# EAGLE board 4.2in display-Panel (EAGLE 9.0.1)
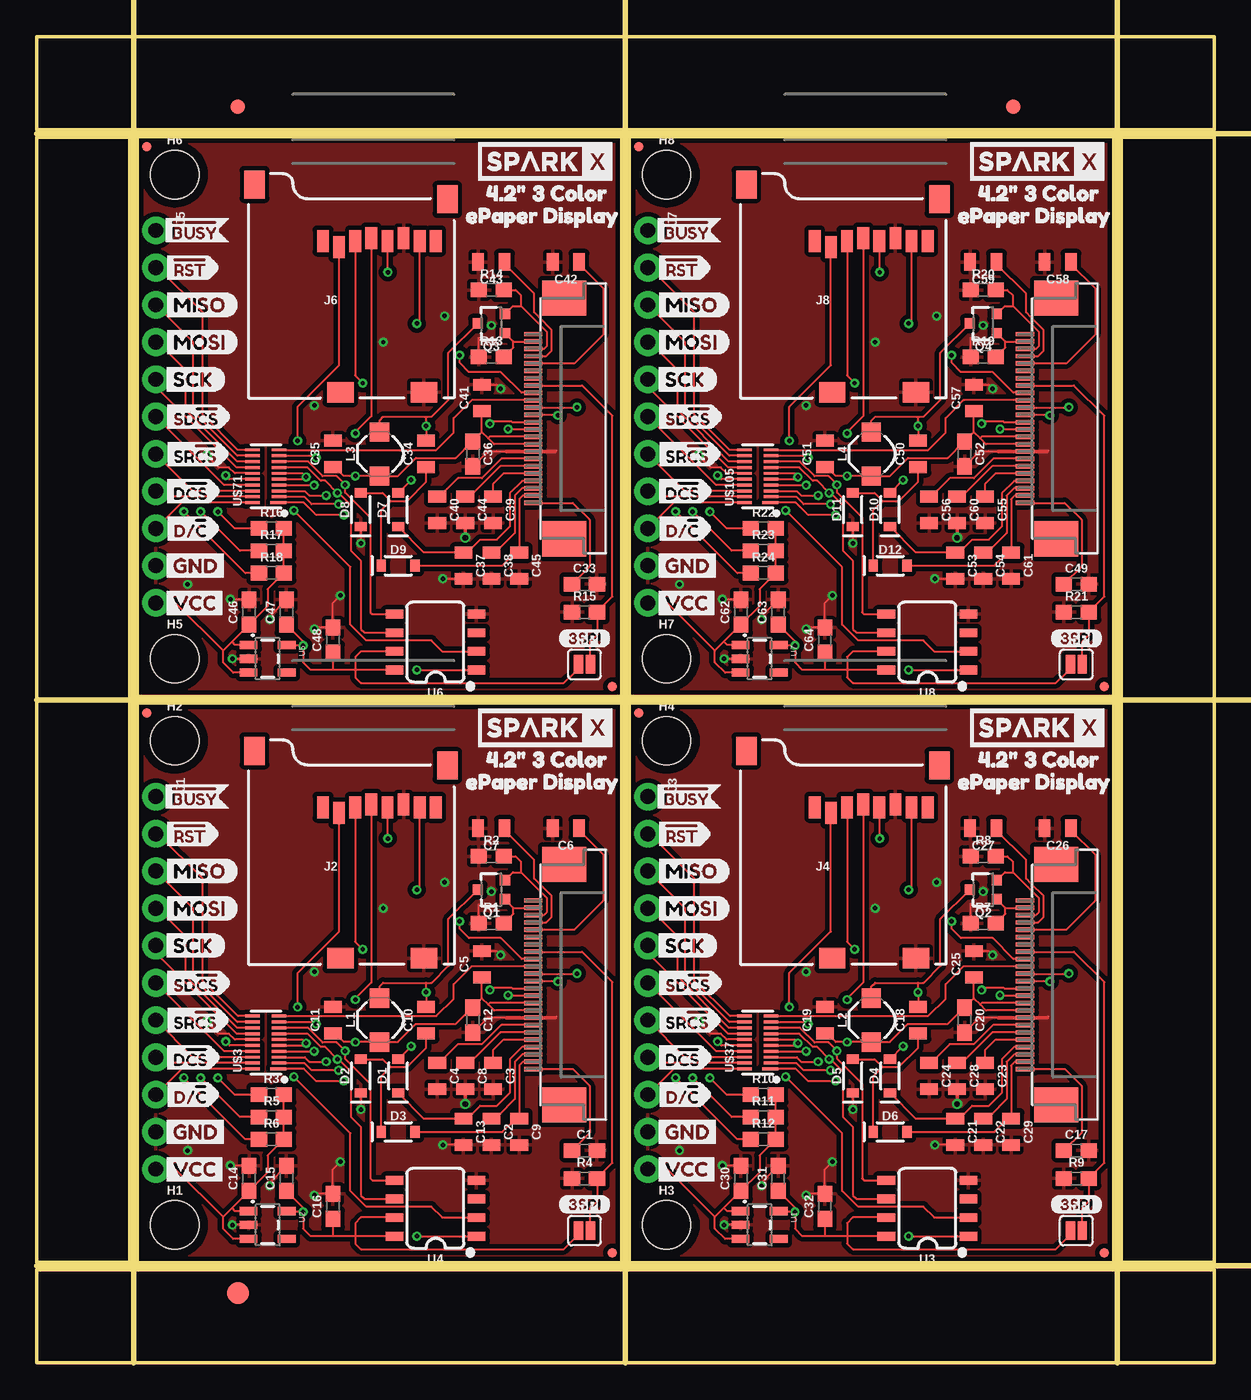
[diagram p0: board, top side]
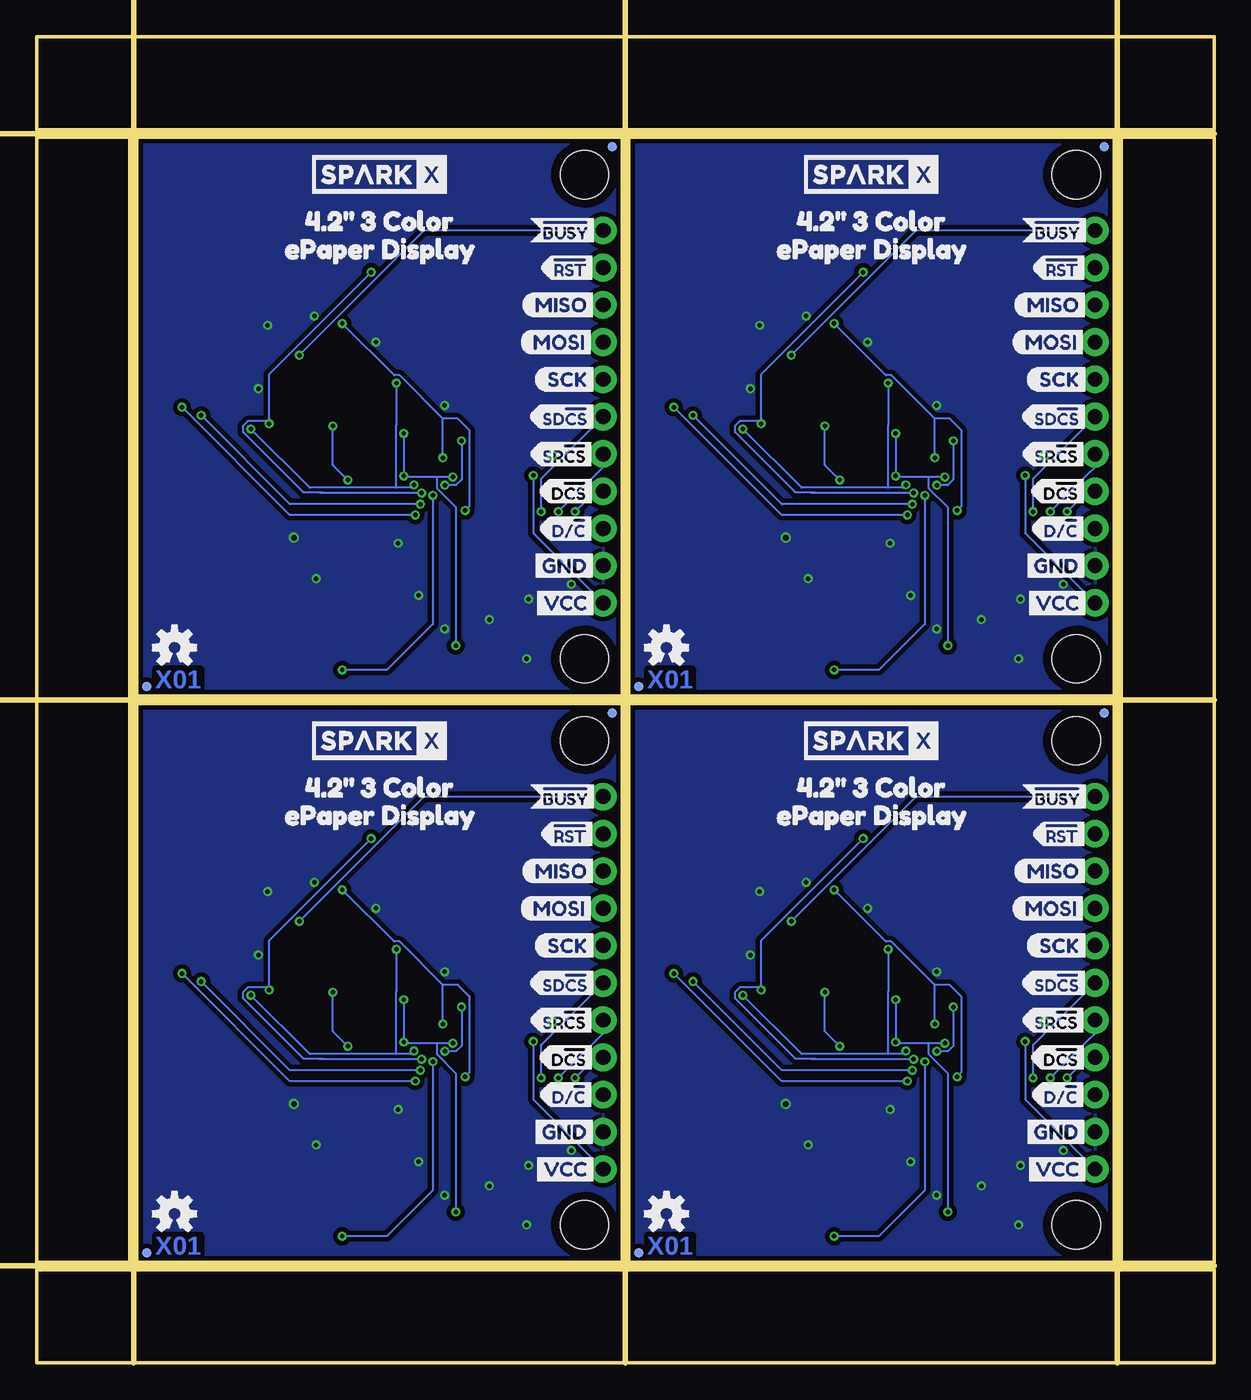
[diagram p1: board, bottom side, seen from below]

Size 80.26 x 90.42 mm. Coordinates in mm from the lower left corner, seen from the top.
Outline: 6.86,6.86 39.88,6.86 39.88,44.96 6.86,44.96 6.86,6.86
Outline: 40.39,6.86 73.41,6.86 73.41,44.96 40.39,44.96 40.39,6.86
Outline: 6.86,45.47 39.88,45.47 39.88,83.57 6.86,83.57 6.86,45.47
Outline: 40.39,45.47 73.41,45.47 73.41,83.57 40.39,83.57 40.39,45.47
Outline: 0,6.35 80.26,6.35 80.26,0 0,0 0,6.35
Outline: 73.91,83.57 80.26,83.57 80.26,6.86 73.91,6.86 73.91,83.57
Outline: 0,90.42 80.26,90.42 80.26,84.07 0,84.07 0,90.42
Outline: 0,83.57 6.35,83.57 6.35,6.86 0,6.86 0,83.57
Copper layers (1*16): Top 0.035mm / dielectric 1.5mm / Bottom 0.035mm
Design rules "SparkFun-2-layer-PCBWay-LIMIT": minimum track width 6mil, minimum drill 0.3mm, track to track 6mil, track to pad 6mil, pad to pad 6mil, via to via 6mil, smd to smd 6mil, copper to edge 6mil, drill to drill 6mil, minimum pad ring 6mil, minimum via ring 6mil, stop-mask expansion 4mil, vias tented up to drill 25mil, thermal gap 10mil
Milling: 6 lines

## Footprints (pad centres in the part's own frame; a part is rotated, then mirrored left to right if it is on the bottom)
0603 = smd 1.1 x 1: 1 -0.85,0; 2 0.85,0
0805 = smd 0.8 x 1.2: 1 -0.9,0; 2 0.9,0
SOD-323 = smd 0.63 x 0.83: A 1.15,0; C -1.15,0
FIDUCIAL-1X2 = smd 1 x 1: 1 0,0
FIDUCIAL-1.5X3 = smd 1.5 x 1.5: 1 0,0
FIDUCIAL-MICRO = smd 0.635 x 0.635: 1 0,0
STAND-OFF = hole 3.302: 0,0
1X11_NO_SILK = drill 1.016 pad 1.88: 1 0,0; 2 2.54,0; 3 5.08,0; 4 7.62,0; 5 10.16,0; 6 12.7,0; 7 15.24,0; 8 17.78,0; 9 20.32,0; 10 22.86,0; 11 25.4,0
MICRO-SD-SOCKET = smd 1.8 x 1.4: CD1 -2.05,0.4; CD2 -7.75,0.4 | smd 0.8 x 1.5: CS -7.84,10.3; DI -6.74,10.7; DO -2.34,10.7; GND -3.44,10.9; RSV1 -8.94,10.7; RSV2 -1.24,10.7; SCLK -4.54,10.7; VCC -5.64,10.9 | smd 1.4 x 1.9: GND1 -13.6,14.55; GND3 -0.45,13.55
SMT-JUMPER_2_NO_SILK = smd 0.635 x 1.27: 1 -0.406,0; 2 0.406,0
INDUCTOR_4.7UH = smd 1.3 x 1.3: P$1 -1.5,0; P$2 1.5,0
SOT323 = smd 0.7 x 0.7: 1 -0.65,-0.925; 2 0.65,-0.925; 3 0,0.925
SOT23-5 = smd 0.55 x 1.2: 1 -0.95,-1.3; 2 0,-1.3; 3 0.95,-1.3; 4 0.95,1.3; 5 -0.95,1.3
SO08 = smd 0.6 x 1.2: 1 -1.905,-2.8; 2 -0.635,-2.8; 3 0.635,-2.8; 4 1.905,-2.8; 5 1.905,2.8; 6 0.635,2.8; 7 -0.635,2.8; 8 -1.905,2.8
24_PIN_FPC_0.5MM = smd 0.3 x 1.25: 1 5.75,2.225; 2 5.25,2.225; 3 4.75,2.225; 4 4.25,2.225; 5 3.75,2.225; 6 3.25,2.225; 7 2.75,2.225; 8 2.25,2.225; 9 1.75,2.225; 10 1.25,2.225; 11 0.75,2.225; 12 0.25,2.225; 13 -0.25,2.225; 14 -0.75,2.225; 15 -1.25,2.225; 16 -1.75,2.225; 17 -2.25,2.225; 18 -2.75,2.225; 19 -3.25,2.225; 20 -3.75,2.225; 21 -4.25,2.225; 22 -4.75,2.225; 23 -5.25,2.225; 24 -5.75,2.225 | smd 2.4 x 3: NC1 8.2,0.1; NC2 -8.2,0.1
UFDFN-20 = smd 0.2 x 1.1: 1 -1.8,-0.85 | smd 0.2 x 1: 2 -1.4,-0.9; 3 -1,-0.9; 4 -0.6,-0.9; 5 -0.2,-0.9; 6 0.2,-0.9; 7 0.6,-0.9; 8 1,-0.9; 9 1.4,-0.9; 10 1.8,-0.9; 11 1.8,0.9; 12 1.4,0.9; 13 1,0.9; 14 0.6,0.9; 15 0.2,0.9; 16 -0.2,0.9; 17 -0.6,0.9; 18 -1,0.9; 19 -1.4,0.9; 20 -1.8,0.9

## Placement (x,y rotation side)
C1  1.0uF  [0603]  37.34,14.48 0 top
C2  1.0uF  [0805]  30.99,15.75 270 top
C3  1.0uF  [0805]  31.12,19.56 270 top
C4  1.0uF  [0805]  27.3,19.56 270 top
C5  1.0uF  [0805]  30.35,27.18 90 top
C6  1.0uF  [0805]  36.07,36.45 180 top
C7  1.0uF  [0805]  30.99,36.45 180 top
C8  1.0uF  [0805]  29.21,19.56 270 top
C9  1.0uF  [0805]  32.89,15.75 270 top
C10  4.7uF  [0805]  26.54,23.37 90 top
C11  4.7uF  [0805]  20.19,23.37 90 top
C12  0.1uF  [0603]  29.72,23.37 270 top
C13  1.0uF  [0805]  29.08,15.75 270 top
C14  1.0uF  [0603]  14.48,12.57 90 top
C15  1.0uF  [0603]  17.02,12.57 90 top
C16  0.1uF  [0603]  20.19,10.67 90 top
C17  1.0uF  [0603]  70.87,14.48 0 top
C18  4.7uF  [0805]  60.07,23.37 90 top
C19  4.7uF  [0805]  53.72,23.37 90 top
C20  0.1uF  [0603]  63.25,23.37 270 top
C21  1.0uF  [0805]  62.61,15.75 270 top
C22  1.0uF  [0805]  64.52,15.75 270 top
C23  1.0uF  [0805]  64.64,19.56 270 top
C24  1.0uF  [0805]  60.83,19.56 270 top
C25  1.0uF  [0805]  63.88,27.18 90 top
C26  1.0uF  [0805]  69.6,36.45 180 top
C27  1.0uF  [0805]  64.52,36.45 180 top
C28  1.0uF  [0805]  62.74,19.56 270 top
C29  1.0uF  [0805]  66.42,15.75 270 top
C30  1.0uF  [0603]  48.01,12.57 90 top
C31  1.0uF  [0603]  50.55,12.57 90 top
C32  0.1uF  [0603]  53.72,10.67 90 top
C33  1.0uF  [0603]  37.34,53.09 0 top
C34  4.7uF  [0805]  26.54,61.98 90 top
C35  4.7uF  [0805]  20.19,61.98 90 top
C36  0.1uF  [0603]  29.72,61.98 270 top
C37  1.0uF  [0805]  29.08,54.36 270 top
C38  1.0uF  [0805]  30.99,54.36 270 top
C39  1.0uF  [0805]  31.12,58.17 270 top
C40  1.0uF  [0805]  27.3,58.17 270 top
C41  1.0uF  [0805]  30.35,65.79 90 top
C42  1.0uF  [0805]  36.07,75.06 180 top
C43  1.0uF  [0805]  30.99,75.06 180 top
C44  1.0uF  [0805]  29.21,58.17 270 top
C45  1.0uF  [0805]  32.89,54.36 270 top
C46  1.0uF  [0603]  14.48,51.18 90 top
C47  1.0uF  [0603]  17.02,51.18 90 top
C48  0.1uF  [0603]  20.19,49.28 90 top
C49  1.0uF  [0603]  70.87,53.09 0 top
C50  4.7uF  [0805]  60.07,61.98 90 top
C51  4.7uF  [0805]  53.72,61.98 90 top
C52  0.1uF  [0603]  63.25,61.98 270 top
C53  1.0uF  [0805]  62.61,54.36 270 top
C54  1.0uF  [0805]  64.52,54.36 270 top
C55  1.0uF  [0805]  64.64,58.17 270 top
C56  1.0uF  [0805]  60.83,58.17 270 top
C57  1.0uF  [0805]  63.88,65.79 90 top
C58  1.0uF  [0805]  69.6,75.06 180 top
C59  1.0uF  [0805]  64.52,75.06 180 top
C60  1.0uF  [0805]  62.74,58.17 270 top
C61  1.0uF  [0805]  66.42,54.36 270 top
C62  1.0uF  [0603]  48.01,51.18 90 top
C63  1.0uF  [0603]  50.55,51.18 90 top
C64  0.1uF  [0603]  53.72,49.28 90 top
D1  0.5A/40V/420mV  [SOD-323]  24.64,19.56 90 top
D2  0.5A/40V/420mV  [SOD-323]  22.1,19.56 90 top
D3  0.5A/40V/420mV  [SOD-323]  24.64,15.75 0 top
D4  0.5A/40V/420mV  [SOD-323]  58.17,19.56 90 top
D5  0.5A/40V/420mV  [SOD-323]  55.63,19.56 90 top
D6  0.5A/40V/420mV  [SOD-323]  58.17,15.75 0 top
D7  0.5A/40V/420mV  [SOD-323]  24.64,58.17 90 top
D8  0.5A/40V/420mV  [SOD-323]  22.1,58.17 90 top
D9  0.5A/40V/420mV  [SOD-323]  24.64,54.36 0 top
D10  0.5A/40V/420mV  [SOD-323]  58.17,58.17 90 top
D11  0.5A/40V/420mV  [SOD-323]  55.63,58.17 90 top
D12  0.5A/40V/420mV  [SOD-323]  58.17,54.36 0 top
E$1  [FIDUCIAL-1X2]  13.72,85.66 0 top
E$2  [FIDUCIAL-1X2]  66.55,85.66 0 top
E$3  [FIDUCIAL-1.5X3]  13.72,4.76 0 top
FD1  FIDUCIALUFIDUCIAL  [FIDUCIAL-MICRO]  7.49,44.32 0 bottom
FD2  FIDUCIALUFIDUCIAL  [FIDUCIAL-MICRO]  39.24,7.49 0 bottom
FD3  FIDUCIALUFIDUCIAL  [FIDUCIAL-MICRO]  39.24,7.49 0 top
FD4  FIDUCIALUFIDUCIAL  [FIDUCIAL-MICRO]  7.49,44.32 0 top
FD5  FIDUCIALUFIDUCIAL  [FIDUCIAL-MICRO]  41.02,44.32 0 bottom
FD6  FIDUCIALUFIDUCIAL  [FIDUCIAL-MICRO]  72.77,7.49 0 bottom
FD7  FIDUCIALUFIDUCIAL  [FIDUCIAL-MICRO]  72.77,7.49 0 top
FD8  FIDUCIALUFIDUCIAL  [FIDUCIAL-MICRO]  41.02,44.32 0 top
FD9  FIDUCIALUFIDUCIAL  [FIDUCIAL-MICRO]  7.49,82.93 0 bottom
FD10  FIDUCIALUFIDUCIAL  [FIDUCIAL-MICRO]  39.24,46.1 0 bottom
FD11  FIDUCIALUFIDUCIAL  [FIDUCIAL-MICRO]  39.24,46.1 0 top
FD12  FIDUCIALUFIDUCIAL  [FIDUCIAL-MICRO]  7.49,82.93 0 top
FD13  FIDUCIALUFIDUCIAL  [FIDUCIAL-MICRO]  41.02,82.93 0 bottom
FD14  FIDUCIALUFIDUCIAL  [FIDUCIAL-MICRO]  72.77,46.1 0 bottom
FD15  FIDUCIALUFIDUCIAL  [FIDUCIAL-MICRO]  72.77,46.1 0 top
FD16  FIDUCIALUFIDUCIAL  [FIDUCIAL-MICRO]  41.02,82.93 0 top
H1  STAND-OFF  [STAND-OFF]  9.4,9.4 0 top
H2  STAND-OFF  [STAND-OFF]  9.4,42.42 0 top
H3  STAND-OFF  [STAND-OFF]  42.93,9.4 0 top
H4  STAND-OFF  [STAND-OFF]  42.93,42.42 0 top
H5  STAND-OFF  [STAND-OFF]  9.4,48.01 0 top
H6  STAND-OFF  [STAND-OFF]  9.4,81.03 0 top
H7  STAND-OFF  [STAND-OFF]  42.93,48.01 0 top
H8  STAND-OFF  [STAND-OFF]  42.93,81.03 0 top
J1  [1X11_NO_SILK]  8.13,38.61 270 top
J2  MICRO-SD_CARD_SOCKETPUSH-PUSH  [MICRO-SD-SOCKET]  28.45,27.18 0 top
J3  [1X11_NO_SILK]  41.66,38.61 270 top
J4  MICRO-SD_CARD_SOCKETPUSH-PUSH  [MICRO-SD-SOCKET]  61.98,27.18 0 top
J5  [1X11_NO_SILK]  8.13,77.22 270 top
J6  MICRO-SD_CARD_SOCKETPUSH-PUSH  [MICRO-SD-SOCKET]  28.45,65.79 0 top
J7  [1X11_NO_SILK]  41.66,77.22 270 top
J8  MICRO-SD_CARD_SOCKETPUSH-PUSH  [MICRO-SD-SOCKET]  61.98,65.79 0 top
JP1  3SPI  [SMT-JUMPER_2_NO_SILK]  37.34,9.02 0 top
JP2  3SPI  [SMT-JUMPER_2_NO_SILK]  70.87,9.02 0 top
JP3  3SPI  [SMT-JUMPER_2_NO_SILK]  37.34,47.62 0 top
JP4  3SPI  [SMT-JUMPER_2_NO_SILK]  70.87,47.62 0 top
L1  10uH  [INDUCTOR_4.7UH]  23.37,23.37 90 top
L2  10uH  [INDUCTOR_4.7UH]  56.9,23.37 90 top
L3  10uH  [INDUCTOR_4.7UH]  23.37,61.98 90 top
L4  10uH  [INDUCTOR_4.7UH]  56.9,61.98 90 top
Q1  310mA/60V/1.6Ω  [SOT323]  30.99,32.26 90 top
Q2  310mA/60V/1.6Ω  [SOT323]  64.52,32.26 90 top
Q3  310mA/60V/1.6Ω  [SOT323]  30.99,70.87 90 top
Q4  310mA/60V/1.6Ω  [SOT323]  64.52,70.87 90 top
R1  10k  [0603]  30.99,29.97 0 top
R2  0.47ohm  [0603]  30.99,34.54 0 top
R3  10k  [0603]  16,18.29 0 top
R4  10k  [0603]  37.34,12.57 0 top
R5  10k  [0603]  16,16.76 0 top
R6  10k  [0603]  16,15.24 0 top
R7  10k  [0603]  64.52,29.97 0 top
R8  0.47ohm  [0603]  64.52,34.54 0 top
R9  10k  [0603]  70.87,12.57 0 top
R10  10k  [0603]  49.53,18.29 0 top
R11  10k  [0603]  49.53,16.76 0 top
R12  10k  [0603]  49.53,15.24 0 top
R13  10k  [0603]  30.99,68.58 0 top
R14  0.47ohm  [0603]  30.99,73.15 0 top
R15  10k  [0603]  37.34,51.18 0 top
R16  10k  [0603]  16,56.9 0 top
R17  10k  [0603]  16,55.37 0 top
R18  10k  [0603]  16,53.85 0 top
R19  10k  [0603]  64.52,68.58 0 top
R20  0.47ohm  [0603]  64.52,73.15 0 top
R21  10k  [0603]  70.87,51.18 0 top
R22  10k  [0603]  49.53,56.9 0 top
R23  10k  [0603]  49.53,55.37 0 top
R24  10k  [0603]  49.53,53.85 0 top
U1  3.3V  [SOT23-5]  49.28,9.4 270 top
U2  3.3V  [SOT23-5]  15.75,9.4 270 top
U3  23K640  [SO08]  60.71,10.54 90 top
U4  23K640  [SO08]  27.18,10.54 90 top
U5  3.3V  [SOT23-5]  15.75,48.01 270 top
U6  23K640  [SO08]  27.18,49.15 90 top
U7  3.3V  [SOT23-5]  49.28,48.01 270 top
U8  23K640  [SO08]  60.71,49.15 90 top
U$1  24_PIN_FPC_0.5MM  [24_PIN_FPC_0.5MM]  36.07,25.78 90 top
U$2  [OSHW-LOGO-S]  37.34,10.16 0 bottom
U$3  TXB0108DQSR  [UFDFN-20]  15.62,21.84 90 top
U$4  [#BUSY0]  8.13,38.61 0 top
U$5  SPARKX-LOGO4  [SPARKX-MEDIUM]  34.67,43.31 0 top
U$6  [#BUSY1]  13.34,38.61 0 bottom
U$7  [D##C10]  8.25,18.29 0 top
U$8  [MISO1]  8.38,33.53 0 top
U$9  [D#CS2]  8.25,20.83 0 top
U$10  [SD#CS0]  8.25,25.91 0 top
U$11  [#RST1]  8.25,36.07 0 top
U$12  [3SPI0]  35.56,10.79 0 top
U$13  [VCC9]  8.38,13.21 0 top
U$14  [GND9]  8.38,15.75 0 top
U$15  [SR#CS1]  8.25,23.37 0 top
U$16  [MOSI0]  8.38,30.99 0 top
U$17  [SCK2]  8.38,28.45 0 top
U$18  SPARKX-LOGO4  [SPARKX-MEDIUM]  23.37,42.42 0 bottom
U$19  [3_COLOR2]  25.78,39.24 0 bottom
U$20  [#RST2]  12.57,36.07 0 bottom
U$21  [VCC9]  13.08,13.21 0 bottom
U$22  [3_COLOR3]  32.89,41.15 0 top
U$23  [4#2#0]  29.72,41.15 0 top
U$24  [MISO3]  13.72,33.53 0 bottom
U$25  [MOSI4]  13.84,30.99 0 bottom
U$26  [SCK5]  12.83,28.45 0 bottom
U$27  [SD#CS6]  13.34,25.91 0 bottom
U$28  [SR#CS7]  13.34,23.37 0 bottom
U$29  [D#CS8]  12.7,20.83 0 bottom
U$30  [D##C9]  12.7,18.29 0 bottom
U$31  [GND11]  13.21,15.75 0 bottom
U$32  [EPAPER_DISPLAY5]  30.99,37.34 0 bottom
U$33  [EPAPER_DISPLAY4]  28.32,39.62 0 top
U$34  [4#2#1]  29.59,39.24 0 bottom
U$35  24_PIN_FPC_0.5MM  [24_PIN_FPC_0.5MM]  69.6,25.78 90 top
U$36  [OSHW-LOGO-S]  70.87,10.16 0 bottom
U$37  TXB0108DQSR  [UFDFN-20]  49.15,21.84 90 top
U$38  [D##C10]  41.78,18.29 0 top
U$39  [#RST1]  41.78,36.07 0 top
U$40  [GND9]  41.91,15.75 0 top
U$41  [D#CS2]  41.78,20.83 0 top
U$42  [SD#CS0]  41.78,25.91 0 top
U$43  [SR#CS1]  41.78,23.37 0 top
U$44  [MISO1]  41.91,33.53 0 top
U$45  [MOSI0]  41.91,30.99 0 top
U$46  [SCK2]  41.91,28.45 0 top
U$47  [#BUSY0]  41.66,38.61 0 top
U$48  SPARKX-LOGO4  [SPARKX-MEDIUM]  68.2,43.31 0 top
U$49  [#BUSY1]  46.86,38.61 0 bottom
U$50  [#RST2]  46.1,36.07 0 bottom
U$51  [MISO3]  47.24,33.53 0 bottom
U$52  [MOSI4]  47.37,30.99 0 bottom
U$53  [SCK5]  46.35,28.45 0 bottom
U$54  [SD#CS6]  46.86,25.91 0 bottom
U$55  [SR#CS7]  46.86,23.37 0 bottom
U$56  [D#CS8]  46.23,20.83 0 bottom
U$57  [D##C9]  46.23,18.29 0 bottom
U$58  [GND11]  46.74,15.75 0 bottom
U$59  [3SPI0]  69.09,10.79 0 top
U$60  [VCC9]  41.91,13.21 0 top
U$61  [VCC9]  46.61,13.21 0 bottom
U$62  SPARKX-LOGO4  [SPARKX-MEDIUM]  56.9,42.42 0 bottom
U$63  [3_COLOR2]  59.31,39.24 0 bottom
U$64  [3_COLOR3]  66.42,41.15 0 top
U$65  [4#2#0]  63.25,41.15 0 top
U$66  [EPAPER_DISPLAY4]  61.85,39.62 0 top
U$67  [EPAPER_DISPLAY5]  64.52,37.34 0 bottom
U$68  [4#2#1]  63.12,39.24 0 bottom
U$69  24_PIN_FPC_0.5MM  [24_PIN_FPC_0.5MM]  36.07,64.39 90 top
U$70  [OSHW-LOGO-S]  37.34,48.77 0 bottom
U$71  TXB0108DQSR  [UFDFN-20]  15.62,60.45 90 top
U$72  [D##C10]  8.25,56.9 0 top
U$73  [#RST1]  8.25,74.68 0 top
U$74  [GND9]  8.38,54.36 0 top
U$75  [D#CS2]  8.25,59.44 0 top
U$76  [SD#CS0]  8.25,64.52 0 top
U$77  [SR#CS1]  8.25,61.98 0 top
U$78  [MISO1]  8.38,72.14 0 top
U$79  [MOSI0]  8.38,69.6 0 top
U$80  [SCK2]  8.38,67.06 0 top
U$81  [#BUSY0]  8.13,77.22 0 top
U$82  SPARKX-LOGO4  [SPARKX-MEDIUM]  34.67,81.92 0 top
U$83  [#BUSY1]  13.34,77.22 0 bottom
U$84  [#RST2]  12.57,74.68 0 bottom
U$85  [MISO3]  13.72,72.14 0 bottom
U$86  [MOSI4]  13.84,69.6 0 bottom
U$87  [SCK5]  12.83,67.06 0 bottom
U$88  [SD#CS6]  13.34,64.52 0 bottom
U$89  [SR#CS7]  13.34,61.98 0 bottom
U$90  [D#CS8]  12.7,59.44 0 bottom
U$91  [D##C9]  12.7,56.9 0 bottom
U$92  [GND11]  13.21,54.36 0 bottom
U$93  [3SPI0]  35.56,49.4 0 top
U$94  [VCC9]  8.38,51.82 0 top
U$95  [VCC9]  13.08,51.82 0 bottom
U$96  SPARKX-LOGO4  [SPARKX-MEDIUM]  23.37,81.03 0 bottom
U$97  [3_COLOR2]  25.78,77.85 0 bottom
U$98  [3_COLOR3]  32.89,79.76 0 top
U$99  [4#2#0]  29.72,79.76 0 top
U$100  [EPAPER_DISPLAY4]  28.32,78.23 0 top
U$101  [EPAPER_DISPLAY5]  30.99,75.95 0 bottom
U$102  [4#2#1]  29.59,77.85 0 bottom
U$103  24_PIN_FPC_0.5MM  [24_PIN_FPC_0.5MM]  69.6,64.39 90 top
U$104  [OSHW-LOGO-S]  70.87,48.77 0 bottom
U$105  TXB0108DQSR  [UFDFN-20]  49.15,60.45 90 top
U$106  [D##C10]  41.78,56.9 0 top
U$107  [#RST1]  41.78,74.68 0 top
U$108  [GND9]  41.91,54.36 0 top
U$109  [D#CS2]  41.78,59.44 0 top
U$110  [SD#CS0]  41.78,64.52 0 top
U$111  [SR#CS1]  41.78,61.98 0 top
U$112  [MISO1]  41.91,72.14 0 top
U$113  [MOSI0]  41.91,69.6 0 top
U$114  [SCK2]  41.91,67.06 0 top
U$115  [#BUSY0]  41.66,77.22 0 top
U$116  SPARKX-LOGO4  [SPARKX-MEDIUM]  68.2,81.92 0 top
U$117  [#BUSY1]  46.86,77.22 0 bottom
U$118  [#RST2]  46.1,74.68 0 bottom
U$119  [MISO3]  47.24,72.14 0 bottom
U$120  [MOSI4]  47.37,69.6 0 bottom
U$121  [SCK5]  46.35,67.06 0 bottom
U$122  [SD#CS6]  46.86,64.52 0 bottom
U$123  [SR#CS7]  46.86,61.98 0 bottom
U$124  [D#CS8]  46.23,59.44 0 bottom
U$125  [D##C9]  46.23,56.9 0 bottom
U$126  [GND11]  46.74,54.36 0 bottom
U$127  [3SPI0]  69.09,49.4 0 top
U$128  [VCC9]  41.91,51.82 0 top
U$129  [VCC9]  46.61,51.82 0 bottom
U$130  SPARKX-LOGO4  [SPARKX-MEDIUM]  56.9,81.03 0 bottom
U$131  [3_COLOR2]  59.31,77.85 0 bottom
U$132  [3_COLOR3]  66.42,79.76 0 top
U$133  [4#2#0]  63.25,79.76 0 top
U$134  [EPAPER_DISPLAY4]  61.85,78.23 0 top
U$135  [EPAPER_DISPLAY5]  64.52,75.95 0 bottom
U$136  [4#2#1]  63.12,77.85 0 bottom

## Library data of the parts
C1 C14 C15 C17 C30 C31 C33 C46 C47 C49 C62 C63 = SparkFun-Capacitors; PROD_ID: CAP-00868
C2-C9 C13 C21-C29 C37-C45 C53-C61 = SparkFun-Capacitors; PROD_ID: CAP-08064
C10 C11 C18 C19 C34 C35 C50 C51 = SparkFun-Capacitors; PROD_ID: CAP-08402
C12 C16 C20 C32 C36 C48 C52 C64 = SparkFun-Capacitors; PROD_ID: CAP-00810
D1-D12 = SparkFun-DiscreteSemi; PROD_ID: DIO-10955
E$1 E$2 FD1-FD16 U$2 U$36 U$70 U$104 = SparkFun-Aesthetics
E$3 = SparkFun-Retired
H1-H8 = SparkFun-Hardware
J1 J3 J5 J7 = SparkFun-Connectors
J2 J4 J6 J8 = SparkFun-Connectors; PROD_ID: CONN-07820
JP1-JP4 = SparkFun-Jumpers
L1-L4 = SparkFun-Coils; PROD_ID: NDUC-13968
Q1-Q4 = SparkFun-DiscreteSemi; PROD_ID: TRANS-11151
R1 R3-R7 R9-R13 R15-R19 R21-R24 = SparkFun-Resistors; PROD_ID: RES-00824
R2 R8 R14 R20 = SparkFun-Resistors
U1 U2 U5 U7 = SparkFun-IC-Power; PROD_ID: VREG-12457
U3 U4 U6 U8 = SparkFun-IC-Memory
U$1 U$35 U$69 U$103 = ePaper
U$3 U$37 U$71 U$105 = SparkFun-IC-Comms; PROD_ID: IC-12292
U$4 U$47 U$81 U$115 = buzzard_labels (27)
U$5 U$18 U$48 U$62 U$82 U$96 U$116 U$130 = SparkX
U$6 U$20 U$24-U$29 U$49-U$56 U$83-U$90 U$117-U$124 = buzzard_labels (32)
U$7 U$11 U$14 U$38-U$40 U$72-U$74 U$106-U$108 = buzzard_labels (22)
U$8 U$16 U$17 U$44-U$46 U$78-U$80 U$112-U$114 = buzzard_labels (25)
U$9 U$10 U$41 U$42 U$75 U$76 U$109 U$110 = buzzard_labels (23)
U$12 U$30 U$31 U$57-U$59 U$91-U$93 U$125-U$127 = buzzard_labels (33)
U$13 U$21 U$60 U$61 U$94 U$95 U$128 U$129 = buzzard_labels (13)
U$15 U$43 U$77 U$111 = buzzard_labels (24)
U$19 U$22 U$23 U$32-U$34 U$63-U$68 U$97-U$102 U$131-U$136 = buzzard_labels (34)

## Nets
3.3V: C5.1 C11.1 C12.1 C15.1 C16.1 J2.VCC JP1.1 L1.P$1 U2.5 U4.7 U4.8 U$1.15 U$1.16 U$3.5 U$3.6
3.3V1: C19.1 C20.1 C25.1 C31.1 C32.1 J4.VCC JP2.1 L2.P$1 U1.5 U3.7 U3.8 U$35.15 U$35.16 U$37.5 U$37.6
3.3V2: C35.1 C36.1 C41.1 C47.1 C48.1 J6.VCC JP3.1 L3.P$1 U5.5 U6.7 U6.8 U$69.15 U$69.16 U$71.5 U$71.6
3.3V3: C51.1 C52.1 C57.1 C63.1 C64.1 J8.VCC JP4.1 L4.P$1 U7.5 U8.7 U8.8 U$103.15 U$103.16 U$105.5 U$105.6
5V: C14.1 J1.11 R3.2 R5.2 R6.2 U2.1 U2.3 U$3.16
5V1: C30.1 J3.11 R10.2 R11.2 R12.2 U1.1 U1.3 U$37.16
5V2: C46.1 J5.11 R16.2 R17.2 R18.2 U5.1 U5.3 U$71.16
5V3: C62.1 J7.11 R22.2 R23.2 R24.2 U7.1 U7.3 U$105.16
5V_!CS!(D): J1.8 R6.1 U$3.19
5V_!CS!(D)1: J3.8 R12.1 U$37.19
5V_!CS!(D)2: J5.8 R18.1 U$71.19
5V_!CS!(D)3: J7.8 R24.1 U$105.19
5V_!CS!(SD): J1.6 R3.1 U$3.17
5V_!CS!(SD)1: J3.6 R10.1 U$37.17
5V_!CS!(SD)2: J5.6 R16.1 U$71.17
5V_!CS!(SD)3: J7.6 R22.1 U$105.17
5V_!CS!(SR): J1.7 R5.1 U$3.18
5V_!CS!(SR)1: J3.7 R11.1 U$37.18
5V_!CS!(SR)2: J5.7 R17.1 U$71.18
5V_!CS!(SR)3: J7.7 R23.1 U$105.18
5V_!RES: J1.2 U$3.11
5V_!RES1: J3.2 U$37.11
5V_!RES2: J5.2 U$71.11
5V_!RES3: J7.2 U$105.11
5V_D/!C: J1.9 U$3.20
5V_D/!C1: J3.9 U$37.20
5V_D/!C2: J5.9 U$71.20
5V_D/!C3: J7.9 U$105.20
5V_MISO: J1.3 U$3.12
5V_MISO1: J3.3 U$37.12
5V_MISO2: J5.3 U$71.12
5V_MISO3: J7.3 U$105.12
5V_MOSI: J1.4 U$3.13
5V_MOSI1: J3.4 U$37.13
5V_MOSI2: J5.4 U$71.13
5V_MOSI3: J7.4 U$105.13
5V_SCLK: J1.5 U$3.14
5V_SCLK1: J3.5 U$37.14
5V_SCLK2: J5.5 U$71.14
5V_SCLK3: J7.5 U$105.14
!BUSY: J1.1 U$1.9
!BUSY1: J3.1 U$35.9
!BUSY2: J5.1 U$69.9
!BUSY3: J7.1 U$103.9
!CS!(D): U$1.12 U$3.2
!CS!(D)1: U$35.12 U$37.2
!CS!(D)2: U$69.12 U$71.2
!CS!(D)3: U$103.12 U$105.2
!CS!(SD): J2.CS U$3.4
!CS!(SD)1: J4.CS U$37.4
!CS!(SD)2: J6.CS U$71.4
!CS!(SD)3: J8.CS U$105.4
!CS!(SR): U4.1 U$3.3
!CS!(SR)1: U3.1 U$37.3
!CS!(SR)2: U6.1 U$71.3
!CS!(SR)3: U8.1 U$105.3
!RES: U$1.10 U$3.10
!RES1: U$35.10 U$37.10
!RES2: U$69.10 U$71.10
!RES3: U$103.10 U$105.10
BS: JP1.2 R4.2 U$1.8
BS1: JP2.2 R9.2 U$35.8
BS2: JP3.2 R15.2 U$69.8
BS3: JP4.2 R21.2 U$103.8
D/!C: U$1.11 U$3.1
D/!C1: U$35.11 U$37.1
D/!C2: U$69.11 U$71.1
D/!C3: U$103.11 U$105.1
GDR: Q1.1 R1.2 U$1.2
GDR1: Q2.1 R7.2 U$35.2
GDR2: Q3.1 R13.2 U$69.2
GDR3: Q4.1 R19.2 U$103.2
GND: C1.2 C2.2 C3.2 C4.2 C5.2 C6.2 C7.2 C8.2 C9.2 C11.2 C12.2 C13.2 C14.2 C15.2 C16.2 D2.C J1.10 J2.CD1 J2.GND R1.1 R2.1 R4.1 U2.2 U4.4 U$1.17 U$3.15
GND1: C17.2 C19.2 C20.2 C21.2 C22.2 C23.2 C24.2 C25.2 C26.2 C27.2 C28.2 C29.2 C30.2 C31.2 C32.2 D5.C J3.10 J4.CD1 J4.GND R7.1 R8.1 R9.1 U1.2 U3.4 U$35.17 U$37.15
GND2: C33.2 C35.2 C36.2 C37.2 C38.2 C39.2 C40.2 C41.2 C42.2 C43.2 C44.2 C45.2 C46.2 C47.2 C48.2 D8.C J5.10 J6.CD1 J6.GND R13.1 R14.1 R15.1 U5.2 U6.4 U$69.17 U$71.15
GND3: C49.2 C51.2 C52.2 C53.2 C54.2 C55.2 C56.2 C57.2 C58.2 C59.2 C60.2 C61.2 C62.2 C63.2 C64.2 D11.C J7.10 J8.CD1 J8.GND R19.1 R20.1 R21.1 U7.2 U8.4 U$103.17 U$105.15
MISO: J2.DO U4.2 U$3.9
MISO1: J4.DO U3.2 U$37.9
MISO2: J6.DO U6.2 U$71.9
MISO3: J8.DO U8.2 U$105.9
MOSI: J2.DI U4.5 U$1.14 U$3.8
MOSI1: J4.DI U3.5 U$35.14 U$37.8
MOSI2: J6.DI U6.5 U$69.14 U$71.8
MOSI3: J8.DI U8.5 U$103.14 U$105.8
N$1: C18.1 D5.A D6.C
N$2: C10.1 D2.A D3.C
N$3: C18.2 D4.A L2.P$2 Q2.3
N$4: J4.RSV1
N$5: C10.2 D1.A L1.P$2 Q1.3
N$6: C34.1 D8.A D9.C
N$7: C34.2 D7.A L3.P$2 Q3.3
N$8: J6.RSV1
N$9: C50.1 D11.A D12.C
N$10: C50.2 D10.A L4.P$2 Q4.3
N$11: J2.RSV1
N$12: J8.RSV1
PREVGH: C13.1 D1.C U$1.21
PREVGH1: C21.1 D4.C U$35.21
PREVGH2: C37.1 D7.C U$69.21
PREVGH3: C53.1 D10.C U$103.21
PREVGL: C9.1 D3.A U$1.23
PREVGL1: C29.1 D6.A U$35.23
PREVGL2: C45.1 D9.A U$69.23
PREVGL3: C61.1 D12.A U$103.23
RESE: Q1.2 R2.2 U$1.3
RESE1: Q2.2 R8.2 U$35.3
RESE2: Q3.2 R14.2 U$69.3
RESE3: Q4.2 R20.2 U$103.3
SCLK: J2.SCLK U4.6 U$1.13 U$3.7
SCLK1: J4.SCLK U3.6 U$35.13 U$37.7
SCLK2: J6.SCLK U6.6 U$69.13 U$71.7
SCLK3: J8.SCLK U8.6 U$103.13 U$105.7
TSCL: U$1.6
TSCL1: U$35.6
TSCL2: U$69.6
TSCL3: U$103.6
TSDA: U$1.7
TSDA1: U$35.7
TSDA2: U$69.7
TSDA3: U$103.7
VCOM: C1.1 U$1.24
VCOM1: C17.1 U$35.24
VCOM2: C33.1 U$69.24
VCOM3: C49.1 U$103.24
VDD: C4.1 U$1.18
VDD1: C24.1 U$35.18
VDD2: C40.1 U$69.18
VDD3: C56.1 U$103.18
VGH: C6.1 U$1.5
VGH1: C26.1 U$35.5
VGH2: C42.1 U$69.5
VGH3: C58.1 U$103.5
VGL: C7.1 U$1.4
VGL1: C27.1 U$35.4
VGL2: C43.1 U$69.4
VGL3: C59.1 U$103.4
VPP: C8.1 U$1.19
VPP1: C28.1 U$35.19
VPP2: C44.1 U$69.19
VPP3: C60.1 U$103.19
VSH: C3.1 U$1.20
VSH1: C23.1 U$35.20
VSH2: C39.1 U$69.20
VSH3: C55.1 U$103.20
VSL: C2.1 U$1.22
VSL1: C22.1 U$35.22
VSL2: C38.1 U$69.22
VSL3: C54.1 U$103.22

## Tracks (layer width: path | path; a pad name or v marks a point on that pad's centre or on a via)
3.3V  (via drill 0.3)
  Top 0.152: C12.1 29.74,24.24 | 29.74,24.24 30.35,24.85 | 30.35,24.85 C5.1 | U$1.16 31.18,24.03 30.78,24.43 | 30.78,24.43 30.35,24.85 | U$1.15 30.88,24.53 30.78,24.43 | C11.1 20.33,22.47 20.93,21.87 v21.72,21.87 L1.P$1 24.62,21.87 25.85,23.1 28.56,23.1 29.7,24.24 29.74,24.24 | U4.7 22.1,9.91 21.72,9.52 21.72,8.64 | C15.1 18.16,10.58 v18.16,10.29 | v18.16,10.29 18.16,9.14 18.67,8.64 20.19,8.64 | U2.5 18.1,10.35 v18.16,10.29 | U4.8 21.72,8.64 | 21.72,8.64 21.72,8.13 22.1,7.75 35.94,7.75 36.7,8.51 36.7,8.79 JP1.1 | U$3.5 18.21,21.64 v18.36,21.79 18.11,22.04 U$3.6 | J2.VCC 22.81,25.93 21.72,24.84 v21.72,24.77 | 21.72,8.64 20.19,8.64 | C16.1 20.19,8.64
  Bottom 0.152: v18.16,10.29 18.16,19.73 19.45,21.02 19.45,21.79 | v21.72,24.77 v21.72,21.87 21.64,21.79 19.45,21.79 | v18.36,21.79 19.45,21.79
3.3V1  (via drill 0.3)
  Top 0.152: C20.1 63.26,24.24 | 63.26,24.24 63.88,24.85 | 63.88,24.85 C25.1 | U$35.16 64.7,24.03 64.31,24.43 | 64.31,24.43 63.88,24.85 | U$35.15 64.41,24.53 64.31,24.43 | C19.1 53.86,22.47 54.46,21.87 v55.24,21.87 L2.P$1 58.15,21.87 59.38,23.1 62.09,23.1 63.23,24.24 63.26,24.24 | U3.7 55.63,9.91 55.24,9.52 55.24,8.64 | C31.1 51.69,10.58 v51.69,10.29 | v51.69,10.29 51.69,9.14 52.2,8.64 53.72,8.64 | U1.5 51.63,10.35 v51.69,10.29 | U3.8 55.24,8.64 | 55.24,8.64 55.24,8.13 55.63,7.75 69.47,7.75 70.23,8.51 70.23,8.79 JP2.1 | U$37.5 51.74,21.64 v51.89,21.79 51.64,22.04 U$37.6 | J4.VCC 56.34,25.93 55.24,24.84 v55.24,24.77 | 55.24,8.64 53.72,8.64 | C32.1 53.72,8.64
  Bottom 0.152: v51.69,10.29 51.69,19.73 52.97,21.02 52.97,21.79 | v55.24,24.77 v55.24,21.87 55.17,21.79 52.97,21.79 | v51.89,21.79 52.97,21.79
3.3V2  (via drill 0.3)
  Top 0.152: C36.1 29.74,62.84 | 29.74,62.84 30.35,63.46 | 30.35,63.46 C41.1 | U$69.16 31.18,62.64 30.78,63.04 | 30.78,63.04 30.35,63.46 | U$69.15 30.88,63.14 30.78,63.04 | C35.1 20.33,61.08 20.93,60.48 v21.72,60.48 L3.P$1 24.62,60.48 25.85,61.7 28.56,61.7 29.7,62.84 29.74,62.84 | U6.7 22.1,48.51 21.72,48.13 21.72,47.24 | C47.1 18.16,49.19 v18.16,48.89 | v18.16,48.89 18.16,47.75 18.67,47.24 20.19,47.24 | U5.5 18.1,48.96 v18.16,48.89 | U6.8 21.72,47.24 | 21.72,47.24 21.72,46.74 22.1,46.35 35.94,46.35 36.7,47.12 36.7,47.4 JP3.1 | U$71.5 18.21,60.25 v18.36,60.4 18.11,60.65 U$71.6 | J6.VCC 22.81,64.54 21.72,63.45 v21.72,63.37 | 21.72,47.24 20.19,47.24 | C48.1 20.19,47.24
  Bottom 0.152: v18.16,48.89 18.16,58.34 19.45,59.63 19.45,60.4 | v21.72,63.37 v21.72,60.48 21.64,60.4 19.45,60.4 | v18.36,60.4 19.45,60.4
3.3V3  (via drill 0.3)
  Top 0.152: C52.1 63.26,62.84 | 63.26,62.84 63.88,63.46 | 63.88,63.46 C57.1 | U$103.16 64.7,62.64 64.31,63.04 | 64.31,63.04 63.88,63.46 | U$103.15 64.41,63.14 64.31,63.04 | C51.1 53.86,61.08 54.46,60.48 v55.24,60.48 L4.P$1 58.15,60.48 59.38,61.7 62.09,61.7 63.23,62.84 63.26,62.84 | U8.7 55.63,48.51 55.24,48.13 55.24,47.24 | C63.1 51.69,49.19 v51.69,48.89 | v51.69,48.89 51.69,47.75 52.2,47.24 53.72,47.24 | U7.5 51.63,48.96 v51.69,48.89 | U8.8 55.24,47.24 | 55.24,47.24 55.24,46.74 55.63,46.35 69.47,46.35 70.23,47.12 70.23,47.4 JP4.1 | U$105.5 51.74,60.25 v51.89,60.4 51.64,60.65 U$105.6 | J8.VCC 56.34,64.54 55.24,63.45 v55.24,63.37 | 55.24,47.24 53.72,47.24 | C64.1 53.72,47.24
  Bottom 0.152: v51.69,48.89 51.69,58.34 52.97,59.63 52.97,60.4 | v55.24,63.37 v55.24,60.48 55.17,60.4 52.97,60.4 | v51.89,60.4 52.97,60.4
5V  (via drill 0.3)
  Top 0.152: R3.2 R5.2 R6.2 15.75,14.14 15.75,12.99 C14.1 | C14.1 14.45,11.69 | U2.3 13.4,8.45 12.7,9.14 12.7,9.95 | C14.1 13.31,10.56 | 13.31,10.56 12.7,9.95 | U2.1 13.53,10.35 13.31,10.56 | J1.11 9.44,13.21 12.7,9.95 | U$3.16 13.15,21.64 v12.89,21.9
  Bottom 0.152: v12.89,21.9 12.89,17.97 J1.11
5V1  (via drill 0.3)
  Top 0.152: R10.2 R11.2 R12.2 49.28,14.14 49.28,12.99 C30.1 | C30.1 47.98,11.69 | U1.3 46.92,8.45 46.23,9.14 46.23,9.95 | C30.1 46.84,10.56 | 46.84,10.56 46.23,9.95 | U1.1 47.06,10.35 46.84,10.56 | J3.11 42.96,13.21 46.23,9.95 | U$37.16 46.67,21.64 v46.41,21.9
  Bottom 0.152: v46.41,21.9 46.41,17.97 J3.11
5V2  (via drill 0.3)
  Top 0.152: R16.2 R17.2 R18.2 15.75,52.74 15.75,51.6 C46.1 | C46.1 14.45,50.3 | U5.3 13.4,47.06 12.7,47.75 12.7,48.55 | C46.1 13.31,49.17 | 13.31,49.17 12.7,48.55 | U5.1 13.53,48.96 13.31,49.17 | J5.11 9.44,51.82 12.7,48.55 | U$71.16 13.15,60.25 v12.89,60.51
  Bottom 0.152: v12.89,60.51 12.89,56.57 J5.11
5V3  (via drill 0.3)
  Top 0.152: R22.2 R23.2 R24.2 49.28,52.74 49.28,51.6 C62.1 | C62.1 47.98,50.3 | U7.3 46.92,47.06 46.23,47.75 46.23,48.55 | C62.1 46.84,49.17 | 46.84,49.17 46.23,48.55 | U7.1 47.06,48.96 46.84,49.17 | J7.11 42.96,51.82 46.23,48.55 | U$105.16 46.67,60.25 v46.41,60.51
  Bottom 0.152: v46.41,60.51 46.41,56.57 J7.11
5V_!CS!(D)  (via drill 0.3)
  Top 0.152: U$3.19 8.51,20.44 J1.8 | R6.1 14.22,15.24 v10.03,19.43
  Bottom 0.152: v10.03,19.43 8.64,20.83 J1.8
5V_!CS!(D)1  (via drill 0.3)
  Top 0.152: U$37.19 42.04,20.44 J3.8 | R12.1 47.75,15.24 v43.56,19.43
  Bottom 0.152: v43.56,19.43 42.16,20.83 J3.8
5V_!CS!(D)2  (via drill 0.3)
  Top 0.152: U$71.19 8.51,59.05 J5.8 | R18.1 14.22,53.85 v10.03,58.04
  Bottom 0.152: v10.03,58.04 8.64,59.44 J5.8
5V_!CS!(D)3  (via drill 0.3)
  Top 0.152: U$105.19 42.04,59.05 J7.8 | R24.1 47.75,53.85 v43.56,58.04
  Bottom 0.152: v43.56,58.04 42.16,59.44 J7.8
5V_!CS!(SD)  (via drill 0.3)
  Top 0.152: U$3.17 12.79,21.24 J1.6 | R3.1 13.5,18.29 v12.35,19.43
  Bottom 0.152: 11.6,22.44 J1.6 12.35,21.68 v12.35,19.43
5V_!CS!(SD)1  (via drill 0.3)
  Top 0.152: U$37.17 46.32,21.24 J3.6 | R10.1 47.02,18.29 v45.88,19.43
  Bottom 0.152: 45.13,22.44 J3.6 45.88,21.68 v45.88,19.43
5V_!CS!(SD)2  (via drill 0.3)
  Top 0.152: U$71.17 12.79,59.85 J5.6 | R16.1 13.5,56.9 v12.35,58.04
  Bottom 0.152: 11.6,61.04 J5.6 12.35,60.29 v12.35,58.04
5V_!CS!(SD)3  (via drill 0.3)
  Top 0.152: U$105.17 46.32,59.85 J7.6 | R22.1 47.02,56.9 v45.88,58.04
  Bottom 0.152: 45.13,61.04 J7.6 45.88,60.29 v45.88,58.04
5V_!CS!(SR)  (via drill 0.3)
  Top 0.152: U$3.18 10.65,20.84 J1.7 | R5.1 13.84,16.76 v11.18,19.43
  Bottom 0.152: J1.7 8.13,22.48 8.61,22 9.3,21.31 v11.18,19.43
5V_!CS!(SR)1  (via drill 0.3)
  Top 0.152: U$37.18 44.18,20.84 J3.7 | R11.1 47.37,16.76 v44.7,19.43
  Bottom 0.152: J3.7 41.66,22.48 42.14,22 42.82,21.31 v44.7,19.43
5V_!CS!(SR)2  (via drill 0.3)
  Top 0.152: U$71.18 10.65,59.45 J5.7 | R17.1 13.84,55.37 v11.18,58.04
  Bottom 0.152: J5.7 8.13,61.09 8.61,60.6 9.3,59.92 v11.18,58.04
5V_!CS!(SR)3  (via drill 0.3)
  Top 0.152: U$105.18 44.18,59.45 J7.7 | R23.1 47.37,55.37 v44.7,58.04
  Bottom 0.152: J7.7 41.66,61.09 42.14,60.6 42.82,59.92 v44.7,58.04
5V_!RES
  Top 0.152: U$3.11 13.72,23.64 11.3,26.06 11.3,33.02 8.25,36.07 J1.2
5V_!RES1
  Top 0.152: U$37.11 47.24,23.64 44.83,26.06 44.83,33.02 41.78,36.07 J3.2
5V_!RES2
  Top 0.152: U$71.11 13.72,62.25 11.3,64.67 11.3,71.63 8.25,74.68 J5.2
5V_!RES3
  Top 0.152: U$105.11 47.24,62.25 44.83,64.67 44.83,71.63 41.78,74.68 J7.2
5V_D/!C
  Top 0.152: U$3.20 9.88,20.04 J1.9
5V_D/!C1
  Top 0.152: U$37.20 43.41,20.04 J3.9
5V_D/!C2
  Top 0.152: U$71.20 9.88,58.65 J5.9
5V_D/!C3
  Top 0.152: U$105.20 43.41,58.65 J7.9
5V_MISO
  Top 0.152: U$3.12 13.69,23.24 10.67,26.26 10.67,30.99 J1.3
5V_MISO1
  Top 0.152: U$37.12 47.21,23.24 44.2,26.26 44.2,30.99 J3.3
5V_MISO2
  Top 0.152: U$71.12 13.69,61.85 10.67,64.87 10.67,69.6 J5.3
5V_MISO3
  Top 0.152: U$105.12 47.21,61.85 44.2,64.87 44.2,69.6 J7.3
5V_MOSI
  Top 0.152: U$3.13 13.65,22.84 10.16,26.34 10.16,29.08 8.25,30.99 J1.4
5V_MOSI1
  Top 0.152: U$37.13 47.18,22.84 43.69,26.34 43.69,29.08 41.78,30.99 J3.4
5V_MOSI2
  Top 0.152: U$71.13 13.65,61.45 10.16,64.95 10.16,67.69 8.25,69.6 J5.4
5V_MOSI3
  Top 0.152: U$105.13 47.18,61.45 43.69,64.95 43.69,67.69 41.78,69.6 J7.4
5V_SCLK
  Top 0.152: U$3.14 13.62,22.44 8.13,27.94 J1.5
5V_SCLK1
  Top 0.152: U$37.14 47.15,22.44 41.66,27.94 J3.5
5V_SCLK2
  Top 0.152: U$71.14 13.62,61.05 8.13,66.55 J5.5
5V_SCLK3
  Top 0.152: U$105.14 47.15,61.05 41.66,66.55 J7.5
!BUSY  (via drill 0.3)
  Top 0.152: U$1.9 33.05,27.53 31.62,28.96 29.46,28.96 28.83,29.59 v28.83,30.1
  Bottom 0.152: v28.83,30.1 20.32,38.61 J1.1
!BUSY1  (via drill 0.3)
  Top 0.152: U$35.9 66.58,27.53 65.15,28.96 62.99,28.96 62.36,29.59 v62.36,30.1
  Bottom 0.152: v62.36,30.1 53.85,38.61 J3.1
!BUSY2  (via drill 0.3)
  Top 0.152: U$69.9 33.05,66.14 31.62,67.56 29.46,67.56 28.83,68.2 v28.83,68.71
  Bottom 0.152: v28.83,68.71 20.32,77.22 J5.1
!BUSY3  (via drill 0.3)
  Top 0.152: U$103.9 66.58,66.14 65.15,67.56 62.99,67.56 62.36,68.2 v62.36,68.71
  Bottom 0.152: v62.36,68.71 53.85,77.22 J7.1
!CS!(D)  (via drill 0.3)
  Top 0.152: U$1.12 35.5,26.03 v35.53,26 | U$3.2 18.24,20.44 18.74,19.94 v20.58,19.94
  Bottom 0.152: v35.53,26 29.48,19.94 v20.58,19.94
!CS!(D)1  (via drill 0.3)
  Top 0.152: U$35.12 69.02,26.03 v69.06,26 | U$37.2 51.77,20.44 52.27,19.94 v54.11,19.94
  Bottom 0.152: v69.06,26 63,19.94 v54.11,19.94
!CS!(D)2  (via drill 0.3)
  Top 0.152: U$69.12 35.5,64.64 v35.53,64.61 | U$71.2 18.24,59.05 18.74,58.55 v20.58,58.55
  Bottom 0.152: v35.53,64.61 29.48,58.55 v20.58,58.55
!CS!(D)3  (via drill 0.3)
  Top 0.152: U$103.12 69.02,64.64 v69.06,64.61 | U$105.2 51.77,59.05 52.27,58.55 v54.11,58.55
  Bottom 0.152: v69.06,64.61 63,58.55 v54.11,58.55
!CS!(SD)  (via drill 0.3)
  Top 0.152: U$3.4 v18.91,21.24 | J2.CS 20.61,29.41 17.78,26.58 v17.78,24.26
  Bottom 0.152: v18.91,21.24 18.16,21.24 17.78,21.62 v17.78,24.26
!CS!(SD)1  (via drill 0.3)
  Top 0.152: U$37.4 v52.44,21.24 | J4.CS 54.14,29.41 51.31,26.58 v51.31,24.26
  Bottom 0.152: v52.44,21.24 51.69,21.24 51.31,21.62 v51.31,24.26
!CS!(SD)2  (via drill 0.3)
  Top 0.152: U$71.4 v18.91,59.85 | J6.CS 20.61,68.02 17.78,65.19 v17.78,62.86
  Bottom 0.152: v18.91,59.85 18.16,59.85 17.78,60.23 v17.78,62.86
!CS!(SD)3  (via drill 0.3)
  Top 0.152: U$105.4 v52.44,59.85 | J8.CS 54.14,68.02 51.31,65.19 v51.31,62.86
  Bottom 0.152: v52.44,59.85 51.69,59.85 51.31,60.23 v51.31,62.86
!CS!(SR)  (via drill 0.3)
  Top 0.152: 29.24,8.64 U4.1 v25.91,8.64 | U$3.3 16.54,20.83 18.29,20.83 18.58,20.54 v19.73,20.54
  Bottom 0.152: v19.73,20.54 19.73,11.77 22.86,8.64 v25.91,8.64
!CS!(SR)1  (via drill 0.3)
  Top 0.152: 62.76,8.64 U3.1 v59.44,8.64 | U$37.3 50.06,20.83 51.82,20.83 52.11,20.54 v53.26,20.54
  Bottom 0.152: v53.26,20.54 53.26,11.77 56.39,8.64 v59.44,8.64
!CS!(SR)2  (via drill 0.3)
  Top 0.152: 29.24,47.24 U6.1 v25.91,47.24 | U$71.3 16.54,59.44 18.29,59.44 18.58,59.14 v19.73,59.14
  Bottom 0.152: v19.73,59.14 19.73,50.37 22.86,47.24 v25.91,47.24
!CS!(SR)3  (via drill 0.3)
  Top 0.152: 62.76,47.24 U8.1 v59.44,47.24 | U$105.3 50.06,59.44 51.82,59.44 52.11,59.14 v53.26,59.14
  Bottom 0.152: v53.26,59.14 53.26,50.37 56.39,47.24 v59.44,47.24
!RES
  Top 0.152: U$1.10 29.64,27.03 28.42,25.81 28.42,24.82 27.24,23.64 16.56,23.64 16.54,23.62 U$3.10
!RES1
  Top 0.152: U$35.10 63.17,27.03 61.95,25.81 61.95,24.82 60.77,23.64 50.09,23.64 50.07,23.62 U$37.10
!RES2
  Top 0.152: U$69.10 29.64,65.64 28.42,64.42 28.42,63.43 27.24,62.25 16.56,62.25 16.54,62.23 U$71.10
!RES3
  Top 0.152: U$103.10 63.17,65.64 61.95,64.42 61.95,63.43 60.77,62.25 50.09,62.25 50.07,62.23 U$105.10
BS
  Top 0.152: JP1.2 37.74,10.57 38.23,11.05 38.23,12.53 R4.2 39.24,13.63 39.24,25.96 37.17,28.03 U$1.8
BS1
  Top 0.152: JP2.2 71.27,10.57 71.76,11.05 71.76,12.53 R9.2 72.77,13.63 72.77,25.96 70.7,28.03 U$35.8
BS2
  Top 0.152: JP3.2 37.74,49.17 38.23,49.66 38.23,51.14 R15.2 39.24,52.24 39.24,64.57 37.17,66.64 U$69.8
BS3
  Top 0.152: JP4.2 71.27,49.17 71.76,49.66 71.76,51.14 R21.2 72.77,52.24 72.77,64.57 70.7,66.64 U$103.8
D/!C  (via drill 0.3)
  Top 0.152: U$1.11 v36.82,26.53 v36.83,26.54 | U$3.1 18.21,20.04 19.05,19.21 v20.92,19.21
  Bottom 0.152: v36.83,26.54 29.5,19.21 v20.92,19.21
D/!C1  (via drill 0.3)
  Top 0.152: U$35.11 70.35,26.53 v70.36,26.54 | U$37.1 51.74,20.04 52.57,19.21 v54.45,19.21
  Bottom 0.152: v70.36,26.54 63.02,19.21 v54.45,19.21
D/!C2  (via drill 0.3)
  Top 0.152: U$69.11 v36.82,65.14 v36.83,65.15 | U$71.1 18.21,58.65 19.05,57.82 v20.92,57.82
  Bottom 0.152: v36.83,65.15 29.5,57.82 v20.92,57.82
D/!C3  (via drill 0.3)
  Top 0.152: U$103.11 70.35,65.14 v70.36,65.15 | U$105.1 51.74,58.65 52.57,57.82 v54.45,57.82
  Bottom 0.152: v70.36,65.15 63.02,57.82 v54.45,57.82
GDR
  Top 0.152: Q1.1 32.49,31.03 | 32.49,31.03 U$1.2 | R1.2 32.49,30.62 32.49,31.03
GDR1
  Top 0.152: Q2.1 66.02,31.03 | 66.02,31.03 U$35.2 | R7.2 66.02,30.62 66.02,31.03
GDR2
  Top 0.152: Q3.1 32.49,69.64 | 32.49,69.64 U$69.2 | R13.2 32.49,69.23 32.49,69.64
GDR3
  Top 0.152: Q4.1 66.02,69.64 | 66.02,69.64 U$103.2 | R19.2 66.02,69.23 66.02,69.64
GND  (via drill 0.3, 0.38)
  Top 0.152: U2.2 v13.34,9.4 | C12.2 30.73,23.53 32,23.53 | 35.34,23.53 35.43,23.62 | U$3.15 13.5,22.04 13.11,22.44 12.41,22.44 v11.58,23.26 | C15.2 15.88,12.28 v15.88,12.06 | D2.C v22.1,17.27 | C14.2 13.25,13.42 v13.21,13.46 | C13.2 v27.7,14.85 v27.69,14.86 | C5.2 31.36,28.08 v31.62,27.81 | R1.1 30.14,31.28 | v20.7,13.72 20.19,13.21 C16.2 19.01,11.52 v18.92,11.43
  Top 0.254: 32,23.53 U$1.17 35.34,23.53 | C8.2 v29.21,17.65
  other vias: 30.99,32.13 18.92,26.67 23.62,30.99 27.81,32.77 10.29,14.48
  pour Top (isolate 0.305): 39.88,44.96 39.88,6.86 6.86,6.86 6.86,44.96
  pour Bottom (isolate 0.305): 39.88,44.96 39.88,6.86 6.86,6.86 6.86,44.96
GND1  (via drill 0.3, 0.38)
  Top 0.152: U1.2 v46.86,9.4 | C20.2 64.26,23.53 65.53,23.53 | 68.87,23.53 68.96,23.62 | U$37.15 47.03,22.04 46.64,22.44 45.93,22.44 v45.11,23.26 | C31.2 49.4,12.28 v49.4,12.06 | D5.C v55.63,17.27 | C30.2 46.77,13.42 v46.74,13.46 | C21.2 v61.22,14.85 v61.21,14.86 | C25.2 64.89,28.08 v65.15,27.81 | R7.1 63.67,31.28 | v54.23,13.72 53.72,13.21 C32.2 52.54,11.52 v52.45,11.43
  Top 0.254: 65.53,23.53 U$35.17 68.87,23.53 | C28.2 v62.74,17.65
  other vias: 64.52,32.13 52.45,26.67 57.15,30.99 61.34,32.77 43.81,14.48
  pour Top (isolate 0.305): 73.41,44.96 73.41,6.86 40.39,6.86 40.39,44.96
  pour Bottom (isolate 0.305): 73.41,44.96 73.41,6.86 40.39,6.86 40.39,44.96
GND2  (via drill 0.3, 0.38)
  Top 0.152: U5.2 v13.34,48.01 | C36.2 30.73,62.14 32,62.14 | 35.34,62.14 35.43,62.23 | U$71.15 13.5,60.65 13.11,61.04 12.41,61.04 v11.58,61.87 | C47.2 15.88,50.89 v15.88,50.67 | D8.C v22.1,55.88 | C46.2 13.25,52.03 v13.21,52.07 | C37.2 27.7,53.46 v27.69,53.47 | C41.2 31.36,66.69 v31.62,66.42 | R13.1 30.14,69.89 | v20.7,52.32 20.19,51.82 C48.2 19.01,50.13 v18.92,50.04
  Top 0.254: 32,62.14 U$69.17 35.34,62.14 | C44.2 v29.21,56.26
  other vias: 30.99,70.74 18.92,65.28 23.62,69.6 27.81,71.37 10.29,53.09
  pour Top (isolate 0.305): 39.88,83.57 39.88,45.47 6.86,45.47 6.86,83.57
  pour Bottom (isolate 0.305): 39.88,83.57 39.88,45.47 6.86,45.47 6.86,83.57
GND3  (via drill 0.3, 0.38)
  Top 0.152: U7.2 v46.86,48.01 | C52.2 64.26,62.14 65.53,62.14 | 68.87,62.14 68.96,62.23 | U$105.15 47.03,60.65 46.64,61.04 45.93,61.04 v45.11,61.87 | C63.2 49.4,50.89 v49.4,50.67 | D11.C v55.63,55.88 | C62.2 46.77,52.03 v46.74,52.07 | C53.2 61.22,53.46 v61.21,53.47 | C57.2 64.89,66.69 v65.15,66.42 | R19.1 63.67,69.89 | v54.23,52.32 53.72,51.82 C64.2 52.54,50.13 v52.45,50.04
  Top 0.254: 65.53,62.14 U$103.17 68.87,62.14 | C60.2 v62.74,56.26
  other vias: 64.52,70.74 52.45,65.28 57.15,69.6 61.34,71.37 43.81,53.09
  pour Top (isolate 0.305): 73.41,83.57 73.41,45.47 40.39,45.47 40.39,83.57
  pour Bottom (isolate 0.305): 73.41,83.57 73.41,45.47 40.39,45.47 40.39,83.57
MISO  (via drill 0.3)
  Top 0.152: U$3.9 18.91,23.24 v19.05,23.11 | v25.91,32.26 26.11,32.46 J2.DO | U4.2 27.64,9.91 26.9,10.64 22.45,10.64 21.38,11.72 21.38,15.66 v17.53,19.51
  Bottom 0.152: v25.91,32.26 22.38,28.73 22,28.73 19.05,25.77 | v19.05,23.11 19.05,25.77 | 19.05,25.77 18.03,25.77 17.25,24.99 17.25,19.79 v17.53,19.51
MISO1  (via drill 0.3)
  Top 0.152: U$37.9 52.44,23.24 v52.58,23.11 | v59.44,32.26 59.64,32.46 J4.DO | U3.2 61.17,9.91 60.43,10.64 55.98,10.64 54.9,11.72 54.9,15.66 v51.05,19.51
  Bottom 0.152: v59.44,32.26 55.9,28.73 55.53,28.73 52.58,25.77 | v52.58,23.11 52.58,25.77 | 52.58,25.77 51.56,25.77 50.77,24.99 50.77,19.79 v51.05,19.51
MISO2  (via drill 0.3)
  Top 0.152: U$71.9 18.91,61.85 v19.05,61.71 | v25.91,70.87 26.11,71.07 J6.DO | U6.2 27.64,48.51 26.9,49.25 22.45,49.25 21.38,50.33 21.38,54.27 v17.53,58.12
  Bottom 0.152: v25.91,70.87 22.38,67.33 22,67.33 19.05,64.38 | v19.05,61.71 19.05,64.38 | 19.05,64.38 18.03,64.38 17.25,63.59 17.25,58.4 v17.53,58.12
MISO3  (via drill 0.3)
  Top 0.152: U$105.9 52.44,61.85 v52.58,61.71 | v59.44,70.87 59.64,71.07 J8.DO | U8.2 61.17,48.51 60.43,49.25 55.98,49.25 54.9,50.33 54.9,54.27 v51.05,58.12
  Bottom 0.152: v59.44,70.87 55.9,67.33 55.53,67.33 52.58,64.38 | v52.58,61.71 52.58,64.38 | 52.58,64.38 51.56,64.38 50.77,63.59 50.77,58.4 v51.05,58.12
MOSI  (via drill 0.3)
  Top 0.152: U$3.8 18.49,22.84 19.5,21.84 20.45,21.84 v21.03,21.27 | U4.5 22.86,12.45 22.74,12.56 22.74,19.01 21.03,20.73 v21.03,21.27 | v21.02,21.26 | v21.02,21.26 v21.03,21.27 | U$1.14 32.16,25.03 v32.13,25.06 | J2.DI 21.71,28.71 v22.23,28.19
  Bottom 0.152: v32.13,25.06 28.12,21.06 22.25,21.06 | v21.02,21.26 21.22,21.06 22.25,21.06 | v22.23,28.19 22.23,25.3 22.25,25.3 22.25,21.06
MOSI1  (via drill 0.3)
  Top 0.152: U$37.8 52.02,22.84 53.03,21.84 53.98,21.84 v54.55,21.27 | U3.5 56.39,12.45 56.27,12.56 56.27,19.01 54.55,20.73 v54.55,21.27 | v54.55,21.26 | v54.55,21.26 v54.55,21.27 | U$35.14 65.69,25.03 v65.66,25.06 | J4.DI 55.24,28.71 v55.75,28.19
  Bottom 0.152: v65.66,25.06 61.65,21.06 55.78,21.06 | v54.55,21.26 54.75,21.06 55.78,21.06 | v55.75,28.19 55.75,25.3 55.78,25.3 55.78,21.06
MOSI2  (via drill 0.3)
  Top 0.152: U$71.8 18.49,61.45 19.5,60.45 20.45,60.45 v21.03,59.87 | U6.5 22.86,51.05 22.74,51.17 22.74,57.62 21.03,59.33 v21.03,59.87 | v21.02,59.86 | v21.02,59.86 v21.03,59.87 | U$69.14 32.16,63.64 v32.13,63.67 | J6.DI 21.71,67.32 v22.23,66.8
  Bottom 0.152: v32.13,63.67 28.12,59.66 22.25,59.66 | v21.02,59.86 21.22,59.66 22.25,59.66 | v22.23,66.8 22.23,63.91 22.25,63.91 22.25,59.66
MOSI3  (via drill 0.3)
  Top 0.152: U$105.8 52.02,61.45 53.03,60.45 53.98,60.45 v54.55,59.87 | U8.5 56.39,51.05 56.27,51.17 56.27,57.62 54.55,59.33 v54.55,59.87 | v54.55,59.86 | v54.55,59.86 v54.55,59.87 | U$103.14 65.69,63.64 v65.66,63.67 | J8.DI 55.24,67.32 v55.75,66.8
  Bottom 0.152: v65.66,63.67 61.65,59.66 55.78,59.66 | v54.55,59.86 54.75,59.66 55.78,59.66 | v55.75,66.8 55.75,63.91 55.78,63.91 55.78,59.66
N$1
  Top 0.152: D5.A 57.11,20.71 57.66,20.16 | 57.66,20.16 58.77,20.16 60.07,21.46 C18.1 | D6.C 57.02,19.52 57.66,20.16
N$2
  Top 0.152: D2.A 23.59,20.71 24.13,20.16 | 24.13,20.16 25.24,20.16 26.54,21.46 C10.1 | D3.C 23.49,19.52 24.13,20.16
N$3  (via drill 0.3)
  Top 0.152: C18.2 v60.07,25.27 60.07,25.91 | L2.P$2 56.9,25.65 57.15,25.91 60.07,25.91 | 60.07,25.91 60.45,25.91 61.59,27.05 61.59,30.26 Q2.3 | D4.A v59.05,21.59
  Bottom 0.152: v59.05,21.59 60.07,22.61 v60.07,25.27
N$5  (via drill 0.3)
  Top 0.152: C10.2 v26.54,25.27 26.54,25.91 | L1.P$2 23.37,25.65 23.62,25.91 26.54,25.91 | 26.54,25.91 26.92,25.91 28.07,27.05 28.07,30.26 Q1.3 | D1.A v25.52,21.59 v25.53,21.59
  Bottom 0.152: v25.53,21.59 26.54,22.61 v26.54,25.27
N$6
  Top 0.152: D8.A 23.59,59.32 24.13,58.77 | 24.13,58.77 25.24,58.77 26.54,60.07 C34.1 | D9.C 23.49,58.13 24.13,58.77
N$7  (via drill 0.3)
  Top 0.152: C34.2 v26.54,63.88 26.54,64.52 | L3.P$2 23.37,64.26 23.62,64.52 26.54,64.52 | 26.54,64.52 26.92,64.52 28.07,65.66 28.07,68.87 Q3.3 | D7.A v25.52,60.2 v25.53,60.2
  Bottom 0.152: v25.53,60.2 26.54,61.21 v26.54,63.88
N$9
  Top 0.152: D11.A 57.11,59.32 57.66,58.77 | 57.66,58.77 58.77,58.77 60.07,60.07 C50.1 | D12.C 57.02,58.13 57.66,58.77
N$10  (via drill 0.3)
  Top 0.152: C50.2 v60.07,63.88 60.07,64.52 | L4.P$2 56.9,64.26 57.15,64.52 60.07,64.52 | 60.07,64.52 60.45,64.52 61.59,65.66 61.59,68.87 Q4.3 | D10.A v59.05,60.2
  Bottom 0.152: v59.05,60.2 60.07,61.21 v60.07,63.88
PREVGH
  Top 0.152: U$1.21 33.09,21.53 32.26,20.7 32.26,18.41 31.37,17.53 30.23,17.53 29.35,16.65 C13.1 26.4,16.65 D1.C
PREVGH1
  Top 0.152: U$35.21 66.62,21.53 65.79,20.7 65.79,18.41 64.9,17.53 63.75,17.53 62.88,16.65 C21.1 59.93,16.65 D4.C
PREVGH2
  Top 0.152: U$69.21 33.09,60.14 32.26,59.31 32.26,57.02 31.37,56.13 30.23,56.13 29.35,55.26 C37.1 26.4,55.26 D7.C
PREVGH3
  Top 0.152: U$103.21 66.62,60.14 65.79,59.31 65.79,57.02 64.9,56.13 63.75,56.13 62.88,55.26 C53.1 59.93,55.26 D10.C
PREVGL
  Top 0.152: U$1.23 33.15,20.53 32.89,20.28 C9.1 32.65,16.65 31.75,15.75 D3.A
PREVGL1
  Top 0.152: U$35.23 66.67,20.53 66.42,20.28 C29.1 66.18,16.65 65.28,15.75 D6.A
PREVGL2
  Top 0.152: U$69.23 33.15,59.14 32.89,58.88 C45.1 32.65,55.26 31.75,54.36 D9.A
PREVGL3
  Top 0.152: U$103.23 66.67,59.14 66.42,58.88 C61.1 66.18,55.26 65.28,54.36 D12.A
RESE
  Top 0.152: U$1.3 34.59,30.53 34.8,30.73 34.8,31.67 33.02,33.45 | R2.2 32.64,34.54 33.02,34.16 33.02,33.45 | Q1.2 32.46,33.45 33.02,33.45
RESE1
  Top 0.152: U$35.3 68.12,30.53 68.33,30.73 68.33,31.67 66.55,33.45 | R8.2 66.17,34.54 66.55,34.16 66.55,33.45 | Q2.2 65.98,33.45 66.55,33.45
RESE2
  Top 0.152: U$69.3 34.59,69.14 34.8,69.34 34.8,70.28 33.02,72.06 | R14.2 32.64,73.15 33.02,72.77 33.02,72.06 | Q3.2 32.46,72.06 33.02,72.06
RESE3
  Top 0.152: U$103.3 68.12,69.14 68.33,69.34 68.33,70.28 66.55,72.06 | R20.2 66.17,73.15 66.55,72.77 66.55,72.06 | Q4.2 65.98,72.06 66.55,72.06
SCLK  (via drill 0.3)
  Top 0.152: U$3.7 18.46,22.44 19.37,21.54 19.66,21.54 v20.49,20.7 20.59,20.7 21.45,19.84 21.45,16.73 22.1,16.09 22.1,11.43 22.35,11.18 U4.6 | U$1.13 32.42,25.53 32.35,25.6 31.06,25.6 v30.89,25.42 | v23.94,35.75 23.94,37.85 J2.SCLK
  Bottom 0.152: v20.49,20.7 27.18,20.7 | 27.18,20.7 27.44,20.7 | 27.18,20.7 27.23,20.75 28.57,20.75 32.66,24.84 32.66,25.29 32.35,25.6 31.06,25.6 v30.89,25.42 30.89,28.8 v23.94,35.75
SCLK1  (via drill 0.3)
  Top 0.152: U$37.7 51.99,22.44 52.9,21.54 53.19,21.54 v54.02,20.7 54.12,20.7 54.98,19.84 54.98,16.73 55.63,16.09 55.63,11.43 55.88,11.18 U3.6 | U$35.13 65.95,25.53 65.88,25.6 64.59,25.6 v64.41,25.42 | v57.46,35.75 57.46,37.85 J4.SCLK
  Bottom 0.152: v54.02,20.7 60.71,20.7 | 60.71,20.7 60.96,20.7 | 60.71,20.7 60.75,20.75 62.1,20.75 66.19,24.84 66.19,25.29 65.88,25.6 64.59,25.6 v64.41,25.42 64.41,28.8 v57.46,35.75
SCLK2  (via drill 0.3)
  Top 0.152: U$71.7 18.46,61.05 19.37,60.14 19.66,60.14 v20.49,59.31 20.59,59.31 21.45,58.45 21.45,55.34 22.1,54.69 22.1,50.04 22.35,49.78 U6.6 | U$69.13 32.42,64.14 32.35,64.21 31.06,64.21 v30.89,64.03 | v23.94,74.36 23.94,76.46 J6.SCLK
  Bottom 0.152: v20.49,59.31 27.18,59.31 | 27.18,59.31 27.44,59.31 | 27.18,59.31 27.23,59.36 28.57,59.36 32.66,63.45 32.66,63.89 32.35,64.21 31.06,64.21 v30.89,64.03 30.89,67.4 v23.94,74.36
SCLK3  (via drill 0.3)
  Top 0.152: U$105.7 51.99,61.05 52.9,60.14 53.19,60.14 v54.02,59.31 54.12,59.31 54.98,58.45 54.98,55.34 55.63,54.69 55.63,50.04 55.88,49.78 U8.6 | U$103.13 65.95,64.14 65.88,64.21 64.59,64.21 v64.41,64.03 | v57.46,74.36 57.46,76.46 J8.SCLK
  Bottom 0.152: v54.02,59.31 60.71,59.31 | 60.71,59.31 60.96,59.31 | 60.71,59.31 60.75,59.36 62.1,59.36 66.19,63.45 66.19,63.89 65.88,64.21 64.59,64.21 v64.41,64.03 64.41,67.4 v57.46,74.36
VCOM
  Top 0.152: U$1.24 36.54,20.03 37.7,18.88 37.7,15.69 C1.1
VCOM1
  Top 0.152: U$35.24 70.07,20.03 71.23,18.88 71.23,15.69 C17.1
VCOM2
  Top 0.152: U$69.24 36.54,58.64 37.7,57.48 37.7,54.29 C33.1
VCOM3
  Top 0.152: U$103.24 70.07,58.64 71.23,57.48 71.23,54.29 C49.1
VDD
  Top 0.152: C4.1 27.44,20.46 28.7,21.72 30.35,21.72 31.67,23.03 U$1.18
VDD1
  Top 0.152: C24.1 60.97,20.46 62.23,21.72 63.88,21.72 65.2,23.03 U$35.18
VDD2
  Top 0.152: C40.1 27.44,59.07 28.7,60.32 30.35,60.32 31.67,61.64 U$69.18
VDD3
  Top 0.152: C56.1 60.97,59.07 62.23,60.32 63.88,60.32 65.2,61.64 U$103.18
VGH
  Top 0.152: C6.1 36.97,36.31 38.61,34.67 38.61,31.5 36.64,29.53 U$1.5
VGH1
  Top 0.152: C26.1 70.5,36.31 72.14,34.67 72.14,31.5 70.17,29.53 U$35.5
VGH2
  Top 0.152: C42.1 36.97,74.92 38.61,73.28 38.61,70.1 36.64,68.14 U$69.5
VGH3
  Top 0.152: C58.1 70.5,74.92 72.14,73.28 72.14,70.1 70.17,68.14 U$103.5
VGL
  Top 0.152: U$1.4 34.73,30.03 35.1,30.4 35.1,31.82 34.24,32.69 33.91,33.02 33.91,34.29 31.89,36.31 C7.1
VGL1
  Top 0.152: U$35.4 68.26,30.03 68.63,30.4 68.63,31.82 67.77,32.69 67.44,33.02 67.44,34.29 65.42,36.31 C27.1
VGL2
  Top 0.152: U$69.4 34.73,68.64 35.1,69.01 35.1,70.43 34.24,71.29 34.24,71.3 33.91,71.63 33.91,72.9 31.89,74.92 C43.1
VGL3
  Top 0.152: U$103.4 68.26,68.64 68.63,69.01 68.63,70.43 67.77,71.29 67.77,71.3 67.44,71.63 67.44,72.9 65.42,74.92 C59.1
VPP
  Top 0.152: U$1.19 31.6,22.53 29.53,20.46 C8.1
VPP1
  Top 0.152: U$35.19 65.13,22.53 63.05,20.46 C28.1
VPP2
  Top 0.152: U$69.19 31.6,61.14 29.53,59.07 C44.1
VPP3
  Top 0.152: U$103.19 65.13,61.14 63.05,59.07 C60.1
VSH
  Top 0.152: C3.1 31.12,21.34 31.81,22.03 U$1.20
VSH1
  Top 0.152: C23.1 64.64,21.34 65.34,22.03 U$35.20
VSH2
  Top 0.152: C39.1 31.12,59.94 31.81,60.64 U$69.20
VSH3
  Top 0.152: C55.1 64.64,59.94 65.34,60.64 U$103.20
VSL
  Top 0.152: U$1.22 33.1,21.03 32.59,20.52 32.59,17.98 31.5,16.89 31.23,16.89 C2.1
VSL1
  Top 0.152: U$35.22 66.62,21.03 66.12,20.52 66.12,17.98 65.02,16.89 64.76,16.89 C22.1
VSL2
  Top 0.152: U$69.22 33.1,59.64 32.59,59.13 32.59,56.59 31.5,55.5 31.23,55.5 C38.1
VSL3
  Top 0.152: U$103.22 66.62,59.64 66.12,59.13 66.12,56.59 65.02,55.5 64.76,55.5 C54.1

## Text on the board
Bottom: X01 | X01 | X01 | X01
Milling: v-score | v-score | v-score | v-score | v-score | v-score